# EAGLE board LED-Lampe Power  ZXLD1362 (EAGLE 6.2)
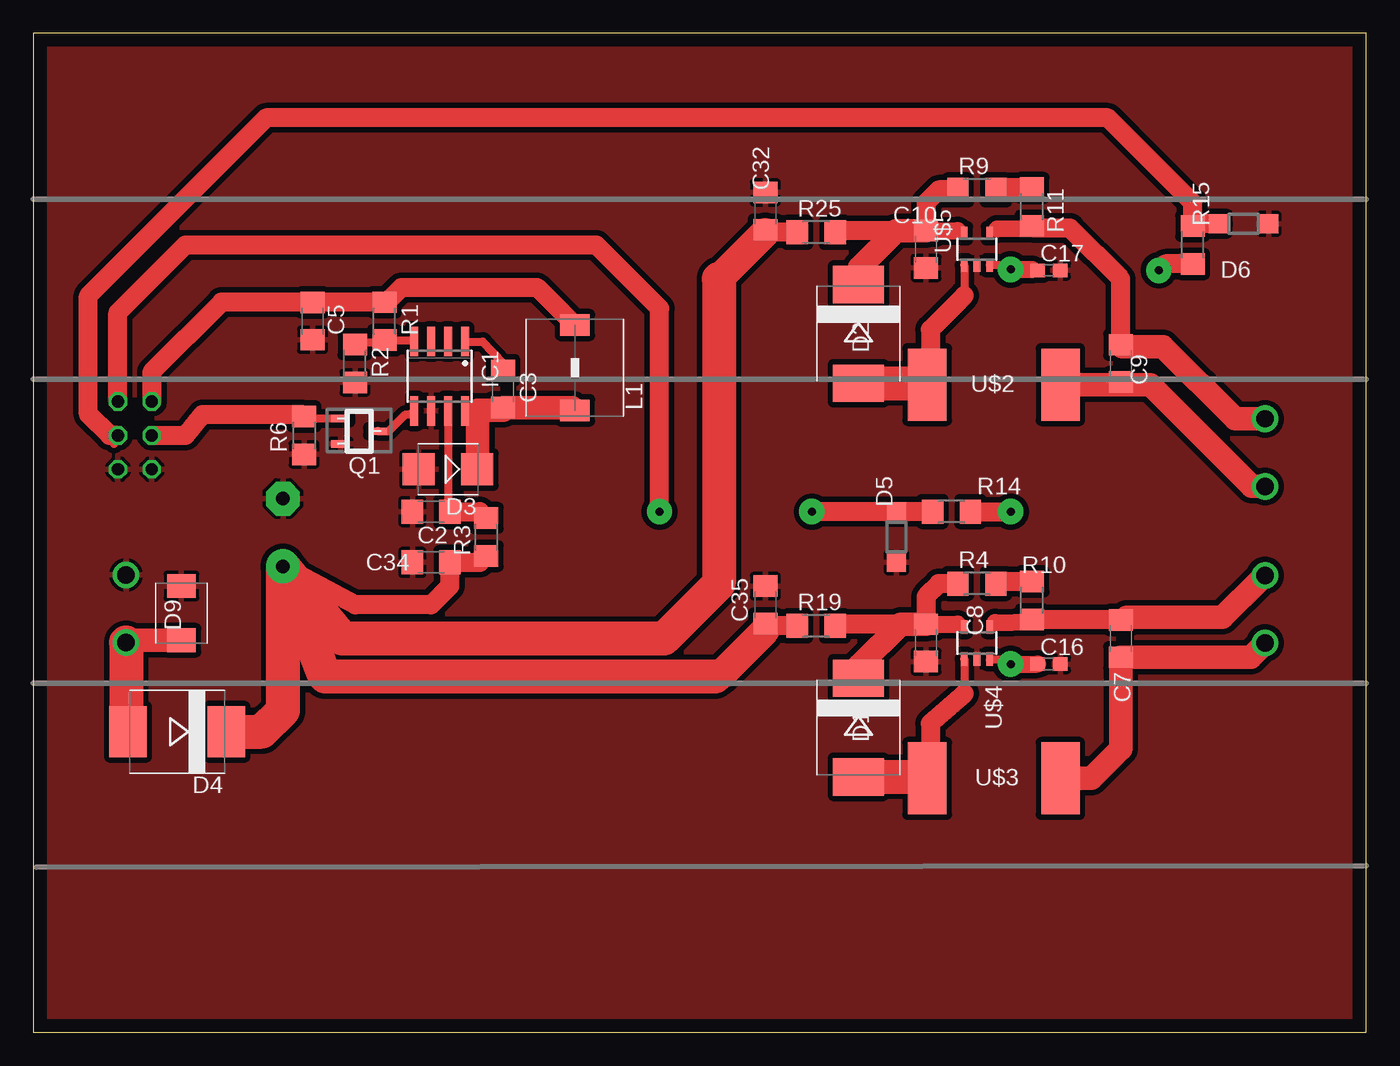
[diagram p0: board, top side]
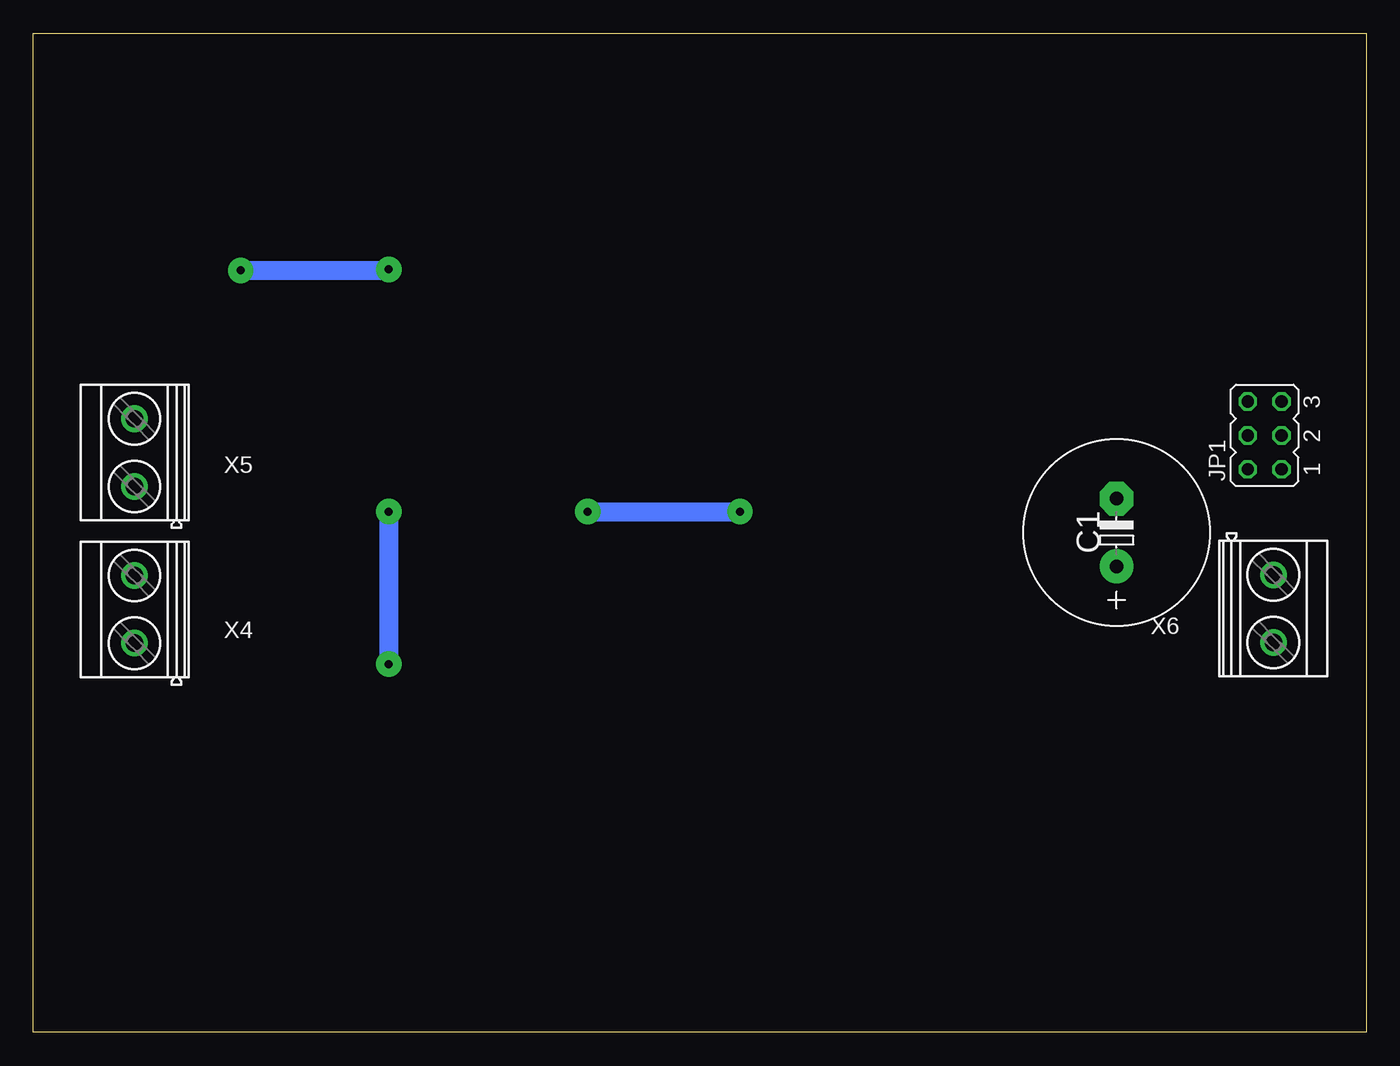
[diagram p1: board, bottom side, seen from below]

Size 100.01 x 74.93 mm. Coordinates in mm from the lower left corner, seen from the top.
Outline: 0,0 100,0 100,62.48 100.01,62.48 100.01,74.93 0,74.93 0,0
Copper layers (1*16): Top 0.035mm / dielectric 1.5mm / Bottom 0.035mm
Design rules: minimum track width 8mil, minimum drill 12mil, track to track 8mil, track to pad 8mil, pad to pad 8mil, via to via 8mil, smd to smd 8mil, copper to edge 40mil, drill to drill 20mil, minimum pad ring 8mil, minimum via ring 8mil, stop-mask expansion 8mil, vias tented up to drill 0mil, thermal gap 10mil

## Footprints (pad centres in the part's own frame; a part is rotated, then mirrored left to right if it is on the bottom)
E5-13 = drill 1.016 pad 2.54: + -2.54,0 | drill 1.016 pad 2.54 octagon: - 2.54,0
C1206 = smd 1.6 x 1.8: 1 -1.4,0; 2 1.4,0
C0603 = smd 1.1 x 1: 1 -0.85,0; 2 0.85,0
SMC = smd 2.8 x 3.8: A 3.7,0; C -3.7,0
SMB = smd 2.4 x 2.4: A 2.2,0; C -2.2,0
SOD123 = smd 1.4 x 1.4: A 1.9,0; C -1.9,0
SMBJ = smd 1.78 x 2.16: A 2.04,0; C -2.03,0
SO08 = smd 0.6 x 2.2: 1 -1.905,-2.6; 2 -0.635,-2.6; 3 0.635,-2.6; 4 1.905,-2.6; 5 1.905,2.6; 6 0.635,2.6; 7 -0.635,2.6; 8 -1.905,2.6
JP3Q = drill 0.914 octagon: 1 -2.54,-1.27; 2 -2.54,1.27; 3 0,-1.27; 4 0,1.27; 5 2.54,-1.27; 6 2.54,1.27
WE-PD_S/M = smd 1.6 x 2.2: 1 -3.2,0; 2 3.2,0
SOT23 = smd 0.55 x 1.4: 1 0.95,1.4; 2 -0.95,1.4; 3 0,-1.4
R1206 = smd 1.6 x 1.803: 1 -1.422,0; 2 1.422,0
FASTON_PIS4728 = smd 5.4 x 2.9: P$1 0,5; P$2 0,-5
SOT23-5 = smd 0.5 x 1: 1 -0.95,-1.2; 2 0,-1.2; 3 0.95,-1.2; 4 0.95,1.2; 5 -0.95,1.2
MKDSN1,5/2-5,08 = drill 1.3 pad 2: 1 -2.561,0.025; 2 2.519,0.025

## Placement (x,y rotation side)
C1  470µ / 35V  [E5-13]  18.73,37.49 90 bottom
C2  4,7µ / 50V X7R  [C1206]  29.84,39.05 180 top
C3  10n  [C1206]  35.24,48.26 270 top
C5  47µ / 6V X5R  [C1206]  20.95,53.34 270 top
C7  1µF / 50V X7R  [C1206]  81.6,29.53 90 top
C8  4,7µ / 50V X7R  [C1206]  66.99,29.21 270 top
C9  1µF / 50V X7R  [C1206]  81.6,50.16 90 top
C10  4,7µ / 50V X7R  [C1206]  66.99,58.74 270 top
C16  100p  [C0603]  76.2,27.62 0 top
C17  100p  [C0603]  76.2,57.15 0 top
C32  10n  [C1206]  54.93,61.59 90 top
C34  10n  [C1206]  29.84,35.24 180 top
C35  10n  [C1206]  54.93,32.07 90 top
D1  MBRS360T3  [SMC]  61.91,22.86 270 top
D2  MBRS360T3  [SMC]  61.91,52.39 270 top
D3  MBRS140T3  [SMB]  31.11,42.23 180 top
D4  MBRS360T3  [SMC]  10.79,22.54 180 top
D5  L103  [SOD123]  64.77,37.15 270 top
D6  L103  [SOD123]  90.81,60.64 0 top
D9  33V  [SMBJ]  11.11,31.43 90 top
IC1  LM2671M  [SO08]  30.48,49.21 180 top
JP1  [JP3Q]  7.62,44.77 90 bottom
L1  WE-PD_S/M 220µH 300mA  [WE-PD_S/M]  40.64,49.85 90 top
Q1  BSS138  [SOT23]  24.45,45.09 90 top
R1  3,9k  [R1206]  26.35,53.34 270 top
R2  2,2k  [R1206]  24.13,50.16 270 top
R3  BLM31PG 601  [R1206]  33.97,37.15 90 top
R4  0,1  [R1206]  70.8,33.66 0 top
R6  10k  [R1206]  20.32,44.77 90 top
R9  0,1  [R1206]  70.8,63.18 0 top
R10  0,1  [R1206]  74.93,32.38 270 top
R11  0,1  [R1206]  74.93,61.91 270 top
R14  2,4k  [R1206]  68.9,39.05 0 top
R15  2,4k  [R1206]  87,59.05 270 top
R19  BLM31PG 601  [R1206]  58.74,30.48 0 top
R25  BLM31PG 601  [R1206]  58.74,60.01 0 top
U$2  FASTON_PIS4728 68µH  [FASTON_PIS4728]  72.07,48.58 90 top
U$3  FASTON_PIS4728 68µH  [FASTON_PIS4728]  72.07,19.05 90 top
U$4  ZXLD1362  [SOT23-5]  70.8,29.21 0 top
U$5  ZXLD1362  [SOT23-5]  70.8,58.74 0 top
X4  MKDSN1,5/2-5,08  [MKDSN1,5/2-5,08]  92.39,31.75 90 bottom
X5  MKDSN1,5/2-5,08  [MKDSN1,5/2-5,08]  92.39,43.5 90 bottom
X6  MKDSN1,5/2-5,08  [MKDSN1,5/2-5,08]  6.99,31.75 270 bottom

## Library data of the parts
C1 C3 C16 C17 C32 C34 C35 R1 R2 R6 R14 R15 = rcl
C2 C5 C7-C10 R3 R4 R9-R11 R19 R25 = resistor
D1-D6 D9 = diode
IC1 = v-reg-3
JP1 = jumper
L1 = wuerth_elektronik_eisos__v6.8_20100429
Q1 = transistors
U$2 U$3 = LED-Treiber
U$4 U$5 = zetex1
X4-X6 = con-phoenix-508; MPN: MKDSN 1,5/2-5.08; OC_FARNELL: 1792903; OC_NEWARK: 30M2397

## Nets
+3V3: C5.1 JP1.6 L1.2 R1.1
+24V: C1.+ C32.1 C34.1 C35.1 D4.C R3.1 R19.1 R25.1
GND: C1.- C2.2 C5.2 C8.2 C10.2 C16.2 C17.2 C32.2 C34.2 C35.2 D3.A D5.A D6.A D9.A IC1.6 JP1.1 JP1.2 Q1.2 R2.2 R6.1 U$4.2 U$5.2 X6.1
N$1: C2.1 IC1.7 R3.2
N$3: C3.1 IC1.1
N$4: IC1.4 R1.2 R2.1
N$5: C3.2 D3.C IC1.8 L1.1
N$6: JP1.4 Q1.1 R6.2
N$7: R4.2 R10.1
N$8: R9.2 R11.1
N$9: D4.A D9.C X6.2
N$10: C16.1 R14.2 U$4.3
N$11: IC1.5 Q1.3
N$13: C17.1 R15.2 U$5.3
N$28: D1.A U$3.P$1 U$4.1
N$29: C7.1 U$3.P$2 X4.1
N$30: C7.2 R10.2 U$4.4 X4.2
N$33: D2.A U$2.P$1 U$5.1
N$34: C9.1 U$2.P$2 X5.1
N$35: C9.2 R11.2 U$5.4 X5.2
N$47: C8.1 D1.C R4.1 R19.2 U$4.5
N$48: C10.1 D2.C R9.1 R25.2 U$5.5
P1.6: D6.C JP1.3 R15.1
P1.7: D5.C JP1.5 R14.1

## Tracks (layer width: path | path; a pad name or v marks a point on that pad's centre or on a via)
+3V3
  Top 0.406: 40.64,53.02 L1.2
  Top 1.27: 21.27,54.76 C5.1
  Top 1.422: JP1.6 8.89,49.53 14.12,54.76 21.27,54.76 R1.1 26.5,54.76 27.62,55.88 37.78,55.88 40.64,53.02
+24V
  Top 0.406: C32.1 54.93,60.01
  Top 0.61: 54.93,30.16 54.93,30.48 C35.1 54.93,30.8
  Top 1.422: C1.+ 24.16,32.07 29.84,32.07 31.25,33.47 C34.1 33.49,35.24 R3.1 | R25.1 54.93,60.01 | R19.1 54.93,30.48
  Top 1.778: 18.73,34.61 18.73,34.92 C1.+ | 51.44,26.67 51.12,26.67
  Top 2.184: 54.93,60.01 51.44,56.52 | 54.93,30.16 51.44,26.67
  Top 2.54: D4.C 17.14,22.54 18.73,24.13 18.73,34.61 21.91,26.67 51.12,26.67 | 51.44,56.52 51.44,33.66 47.31,29.53 23.18,29.53 18.73,34.92
GND
  pour Top (isolate 0.406): 0,74.93 100,74.93 100,0 0,0
N$1
  Top 0.61: IC1.7 31.11,39.37 31.43,39.05
  Top 1.422: C2.1 31.43,39.05 33.49,39.05 R3.2
N$3
  Top 0.61: IC1.1 33.73,51.81 35.24,50.16 C3.1
N$4
  Top 0.406: 25.72,51.75 R1.2
  Top 0.61: R2.1 24.13,51.75 25.72,51.75 | R1.2 28.57,51.92 IC1.4
N$5
  Top 0.61: IC1.8 33.34,46.61 33.34,46.67
  Top 1.27: 40.43,46.86 L1.1 | D3.C 33.34,42.23 | C3.2 35.24,46.99
  Top 1.778: 40.43,46.86 C3.2 35.24,46.67 33.34,46.67 33.34,42.23
N$6
  Top 0.406: 20.32,46.04 R6.2
  Top 0.61: Q1.1 20.32,46.03 20.32,46.04
  Top 1.422: JP1.4 11.43,44.77 12.7,46.35 20.15,46.35 R6.2
N$7
  Top 1.27: 72.38,33.81 R4.2
  Top 1.422: R10.1 72.38,33.81
N$8
  Top 1.422: R11.1 72.38,63.33 R9.2
N$9
  Top 0.406: 6.99,22.54 D4.A 7.3,22.54 7.3,22.86 6.99,22.86 6.96,22.89
  Top 1.27: 6.81,29.4 X6.2
  Top 1.778: D9.C 6.81,29.4
  Top 2.54: X6.2 6.96,22.89
N$10  (via drill 0.6 pad 1.91)
  Top 0.406: v73.34,27.62 73.03,27.94 | 71.75,27.94 U$4.3
  Top 0.61: 73.03,27.94 71.75,27.94
  Top 1.27: v73.34,27.62 C16.1
  Top 1.422: R14.2 v73.34,39.05
  Bottom 1.422: v73.34,39.05 v73.34,27.62
N$11
  Top 0.61: Q1.3 26.67,45.09 27.94,46.35 28.32,46.35 IC1.5
N$13  (via drill 0.6 pad 1.91)
  Top 0.406: 73.34,57.15 72.95,57.54
  Top 0.61: 74.96,57.22 C17.1 | v73.34,57.22 73.34,57.15 | 72.95,57.54 U$5.3
  Top 1.27: v73.34,57.22 74.96,57.22
  Top 1.422: R15.2 84.94,57.63 v84.45,57.15
  Bottom 0.61: 73.41,57.15 v73.34,57.22
  Bottom 1.422: v84.45,57.15 73.41,57.15
N$28
  Top 0.61: U$4.1 69.85,25.4 | 67.31,19.29 U$3.P$1
  Top 1.422: 69.85,25.4 67.31,23.18 67.31,19.29
  Top 2.54: D1.A 66.96,19.16 U$3.P$1
N$29
  Top 1.778: U$3.P$2 79.38,19.05 81.6,21.27 C7.1 91.36,28.13 X4.1
N$30
  Top 0.406: U$4.4 72.15,30.73
  Top 1.27: X4.2 92.1,34 | 82.05,31.11 C7.2 | 74.97,30.93 R10.2 74.93,30.8 72.15,30.73
  Top 1.422: C7.2 74.97,30.93
  Top 1.778: 92.1,34 89.22,31.11 82.05,31.11
N$33
  Top 0.61: U$5.1 69.85,55.25 | 67.31,48.81 U$2.P$1
  Top 1.422: 69.85,55.25 67.31,52.7 67.31,48.81
  Top 2.54: D2.A 66.96,48.69 U$2.P$1
N$34
  Top 0.406: X5.1 92.39,40.96
  Top 1.27: 81.78,48.58 C9.1
  Top 1.778: U$2.P$2 81.78,48.58 83.82,48.58 91.44,40.96 92.39,40.96
N$35
  Top 0.406: U$5.4 72.32,60.26
  Top 0.61: R11.2 74.93,60.33
  Top 1.27: 81.73,51.44 C9.2 | 75.1,60.33 R11.2 | 72.32,60.26 74.93,60.33
  Top 1.422: C9.2 81.6,56.52 77.79,60.33 75.1,60.33
  Top 1.778: X5.2 90.19,46.02 84.77,51.44 81.73,51.44
N$47
  Top 0.406: 69.53,30.8 69.85,30.48 U$4.5
  Top 0.61: 69.34,30.61 69.53,30.8 | C8.1 66.86,30.61 66.83,30.64
  Top 1.27: 60.29,30.61 R19.2 | D1.C 61.99,27.51 | 66.99,30.8 66.83,30.64 66.67,30.48 | C8.1 69.34,30.61
  Top 1.422: 65.09,30.61 60.29,30.61 | R4.1 67.94,33.66 66.99,32.7 66.99,30.8
  Top 1.778: C8.1 65.09,30.61 61.99,27.51
N$48
  Top 0.406: 69.65,60.14 U$5.5
  Top 0.61: 69.34,60.14 69.65,60.14
  Top 1.27: 60.61,60.14 R25.2 | D2.C 61.99,57.36 | C10.1 69.34,60.14
  Top 1.422: 64.77,60.14 60.61,60.14 | R9.1 67.94,63.18 66.99,62.23 C10.1
  Top 1.778: C10.1 64.77,60.14 61.99,57.36
P1.6
  Top 0.61: JP1.3 6.03,44.13
  Top 1.422: JP1.3 5.71,44.77 4.13,46.35 4.13,55.24 17.46,68.58 80.64,68.58 87,62.23 R15.1 86.84,60.64 D6.C
P1.7  (via drill 0.6 pad 1.91)
  Top 0.61: 64.46,39.05 D5.C
  Top 1.422: JP1.5 6.35,53.98 11.43,59.05 42.23,59.05 46.99,54.29 v46.99,39.05 | R14.1 64.46,39.05 v58.42,39.05
  Bottom 1.422: v58.42,39.05 v46.99,39.05